# EAGLE board Nusbio1.0.Light (EAGLE 7.6.0)
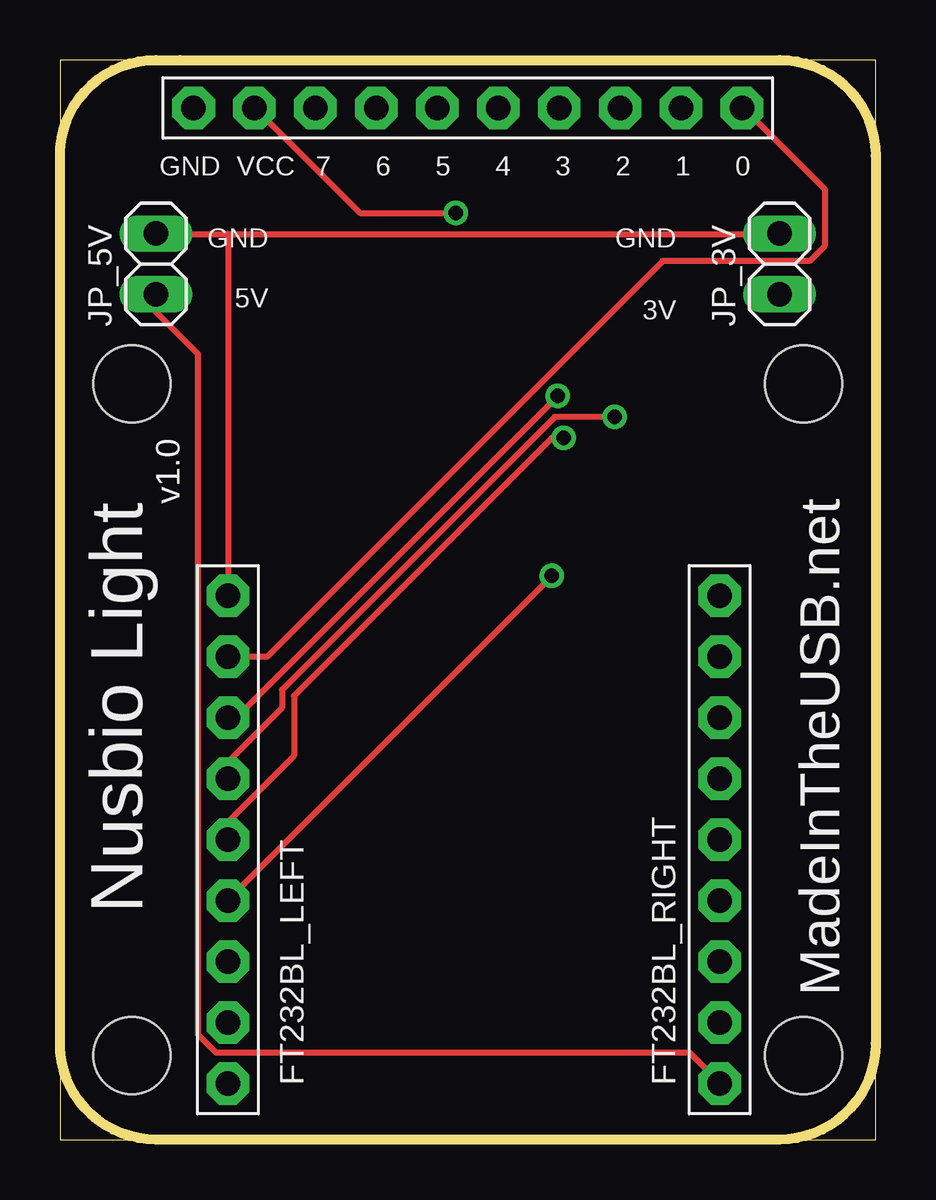
[diagram p0: board, top side]
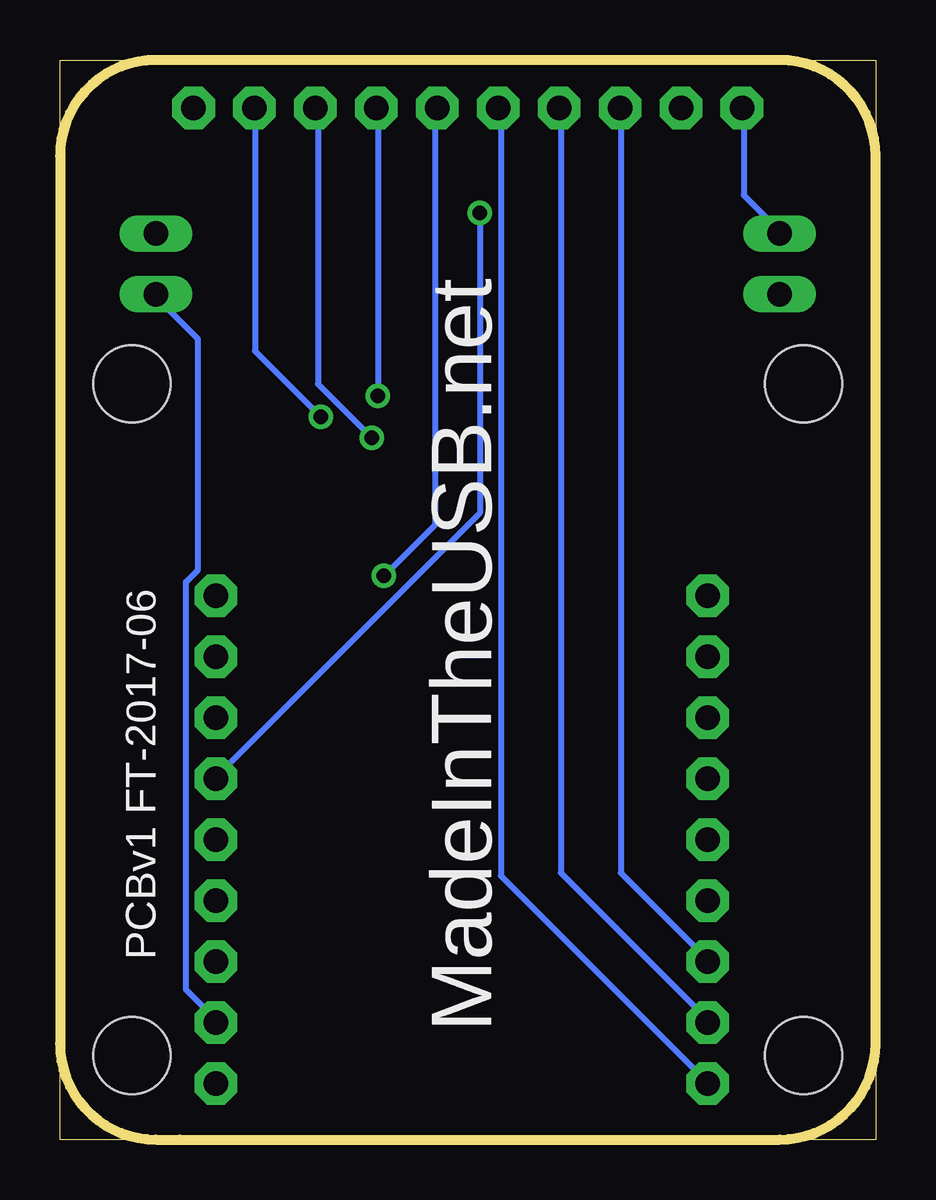
[diagram p1: board, bottom side, seen from below]

Size 34 x 45 mm. Coordinates in mm from the lower left corner, seen from the top.
Outline: 4,0 0,0 0,4
Outline: 29,0 34,0 34,4
Outline: 34,41 34,45 30,45
Outline: 5,45 0,45 0,41
Outline: 0,41 arc-90 4,45 5,45
Outline: 5,45 30,45
Outline: 30,45 arc-90 34,41
Outline: 34,41 34,4
Outline: 34,4 arc-90 30,0 29,0
Outline: 29,0 4,0
Outline: 4,0 arc-90 0,4
Outline: 0,4 0,41
Copper layers (1*16): Top 0.035mm / dielectric 1.5mm / Bottom 0.035mm
Design rules "default": minimum track width 10mil, minimum drill 24mil, track to track 8mil, track to pad 8mil, pad to pad 8mil, via to via 8mil, smd to smd 8mil, copper to edge 40mil, drill to drill 8mil, minimum pad ring 10mil, minimum via ring 8mil, stop-mask expansion 4mil, vias tented up to drill 0mil, thermal gap 10mil
Holes 3.2 mm at 3,3.5 31,3.5 3,31.5 31,31.5

## Footprints (pad centres in the part's own frame; a part is rotated, then mirrored left to right if it is on the bottom)
1X09-BIG = drill 1.016 pad 1.778 octagon: 1 -10.16,0; 2 -7.62,0; 3 -5.08,0; 4 -2.54,0; 5 0,0; 6 2.54,0; 7 5.08,0; 8 7.62,0; 9 10.16,0
1X02 = drill 1.016 long: 1 -1.27,0; 2 1.27,0
1X10-BIG = drill 1.016 pad 1.778 octagon: 1 -11.43,0; 2 -8.89,0; 3 -6.35,0; 4 -3.81,0; 5 -1.27,0; 6 1.27,0; 7 3.81,0; 8 6.35,0; 9 8.89,0; 10 11.43,0

## Placement (x,y rotation side)
FT232BL_LEFT  [1X09-BIG]  7,12.5 90 top
FT232BL_RIGHT  [1X09-BIG]  27.5,12.5 90 top
JP_3V  [1X02]  30,36.5 90 top
JP_5V  [1X02]  4,36.5 90 top
NUSBIO_OUT  PINHD-1X10  [1X10-BIG]  17,43 180 top

## Library data of the parts
FT232BL_LEFT FT232BL_RIGHT NUSBIO_OUT = adafruit
JP_3V JP_5V = pinhead

## Nets
3V: FT232BL_RIGHT.2 JP_3V.1
5V: FT232BL_RIGHT.1 JP_5V.1
CTS_G4: FT232BL_LEFT.4 NUSBIO_OUT.5
DCD_G3: FT232BL_LEFT.7 NUSBIO_OUT.4
DSR_G1: FT232BL_LEFT.6 NUSBIO_OUT.2
DTR_G2: FT232BL_LEFT.5 NUSBIO_OUT.3
GND: FT232BL_LEFT.9 JP_3V.2 JP_5V.2 NUSBIO_OUT.10
NUSBIO_VCC: FT232BL_RIGHT.6 NUSBIO_OUT.9
RI_G0: FT232BL_LEFT.8 NUSBIO_OUT.1
RTS_G7: FT232BL_LEFT.3 NUSBIO_OUT.8
RX_G6: FT232BL_LEFT.2 NUSBIO_OUT.7
TX_G5: FT232BL_LEFT.1 NUSBIO_OUT.6

## Tracks (layer width: path | path; a pad name or v marks a point on that pad's centre or on a via)
3V
  Bottom 0.254: JP_3V.1 30,35.12 28.25,33.38 28.25,23.75 28.75,23.25 28.75,6.25 27.5,5 FT232BL_RIGHT.2
5V
  Top 0.254: JP_5V.1 4,34.5 5.75,32.75 5.75,4.38 6.5,3.62 26.25,3.62 27.5,2.38 FT232BL_RIGHT.1
CTS_G4  (via drill 0.61)
  Top 0.254: v20.5,23.5 7,10 FT232BL_LEFT.4
  Bottom 0.254: v20.5,23.5 18.38,25.62 18.38,43 NUSBIO_OUT.5
DCD_G3  (via drill 0.61)
  Top 0.254: v20.75,31 7.38,17.62 7,17.62 FT232BL_LEFT.7
  Bottom 0.254: v20.75,31 20.75,43 NUSBIO_OUT.4
DSR_G1  (via drill 0.61)
  Top 0.254: FT232BL_LEFT.6 7,15.75 9.25,18 9.25,18.75 20.62,30.12 v23.12,30.12
  Bottom 0.254: v23.12,30.12 25.88,32.88 25.88,43 NUSBIO_OUT.2
DTR_G2  (via drill 0.61)
  Top 0.254: FT232BL_LEFT.5 7,13.25 9.75,16 9.75,18.5 20.5,29.25 v21,29.25
  Bottom 0.254: v21,29.25 23.25,31.5 23.25,43 NUSBIO_OUT.3
GND
  Top 0.254: 7,37.75 4,37.75 JP_5V.2 | 7,37.75 30,37.75 JP_3V.2 | 7,37.75 FT232BL_LEFT.9
  Bottom 0.254: JP_5V.2 4,37.88 5.5,39.38 5.5,43 NUSBIO_OUT.10
NUSBIO_VCC  (via drill 0.61)
  Top 0.254: v16.5,38.62 12.5,38.62 8.12,43 NUSBIO_OUT.9
  Bottom 0.254: v16.5,38.62 16.5,26.12 27.5,15.12 FT232BL_RIGHT.6
RI_G0
  Top 0.254: FT232BL_LEFT.8 8.62,20.12 25.12,36.62 31.25,36.62 31.88,37.25 31.88,39.62 28.5,43 NUSBIO_OUT.1
RTS_G7
  Bottom 0.254: FT232BL_LEFT.3 7,7.5 10.62,11.12 10.62,43 NUSBIO_OUT.8
RX_G6
  Bottom 0.254: FT232BL_LEFT.2 7,5 13.12,11.12 13.12,43 NUSBIO_OUT.7
TX_G5
  Bottom 0.254: FT232BL_LEFT.1 7,2.38 15.62,11 15.62,43 NUSBIO_OUT.6

## Text on the board
tNames: GND | VCC | 7 | 6 | 5 | 4 | 3 | 2 | 1 | 0 | GND | GND | 5V | 3V | v1.0 | Nusbio Light | MadeInTheUSB.net
bNames: PCBv1 FT-2017-06 | MadeInTheUSB.net